# Altium PCB spb_pcb.PcbDoc
Units mm, origin at the board's own origin, x right, y up, seen from the top; angles counter-clockwise.
Board outline 91.69 x 83.57 mm, 2 copper layers (Top Layer, Bottom Layer); 104 components, 72 nets, 482 pads, 20 vias.
Unrouted connection lines stored in the file: 2.
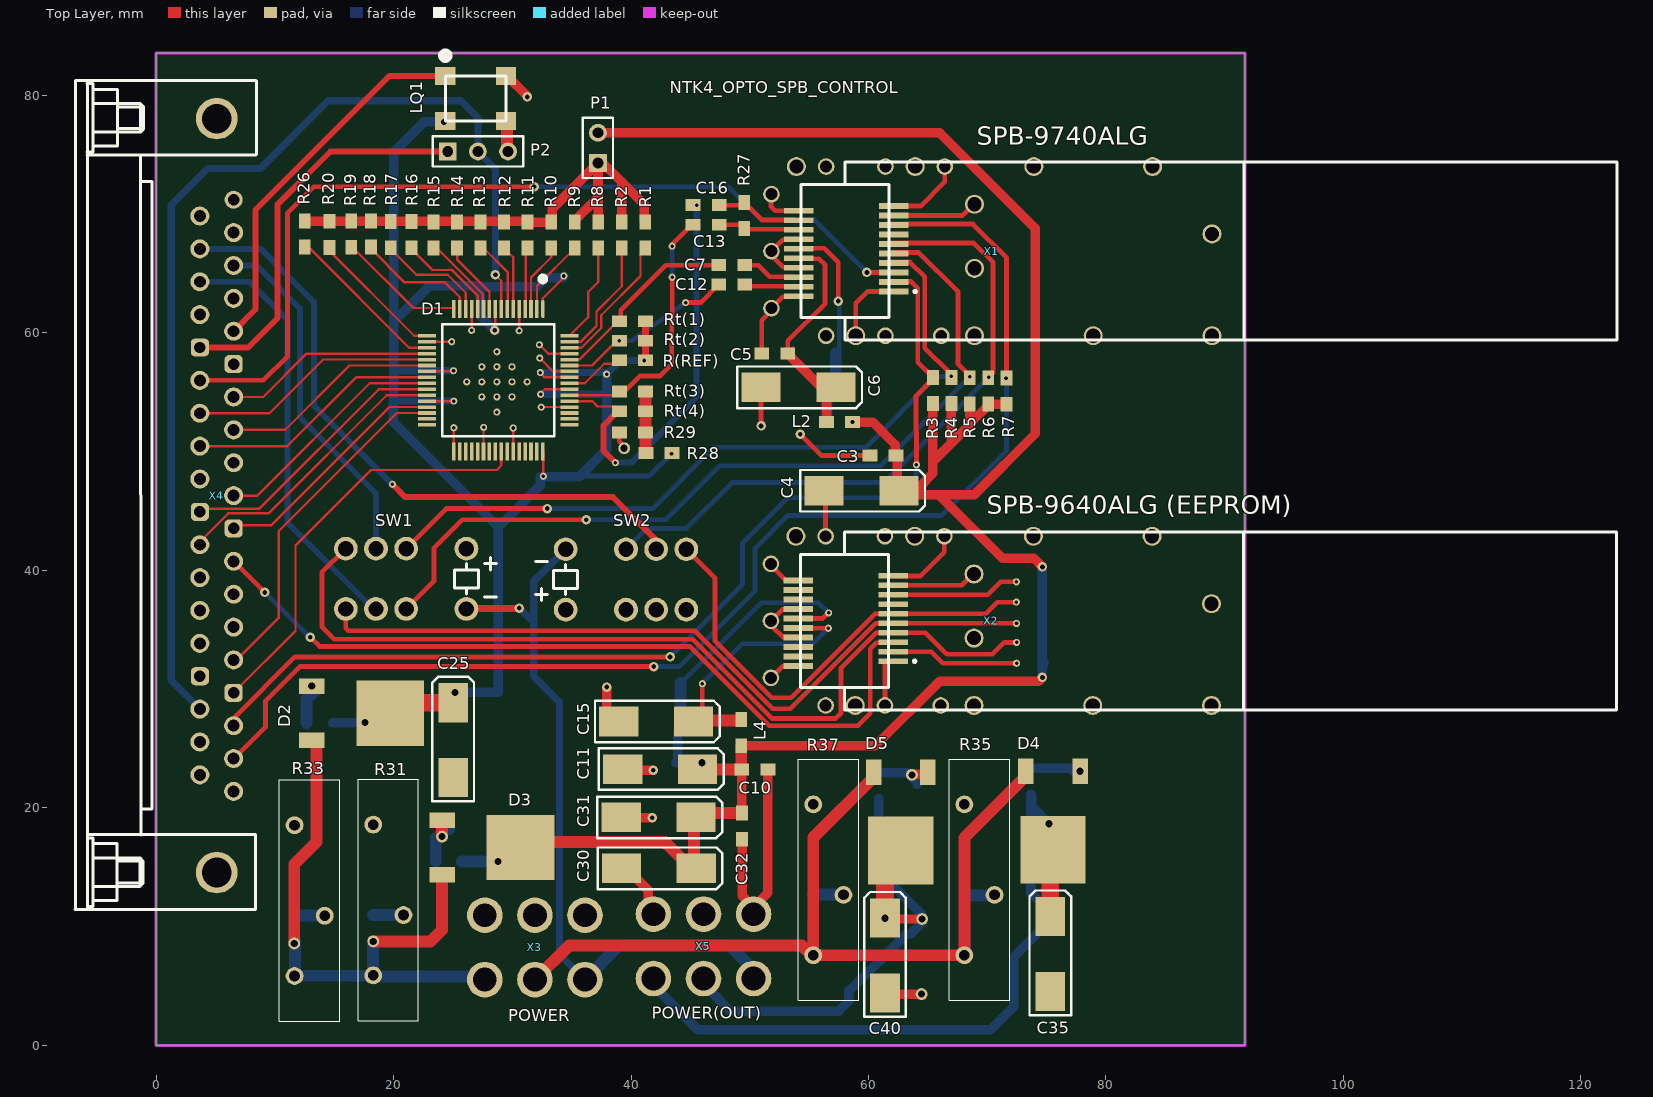
[diagram p0: Top Layer view]
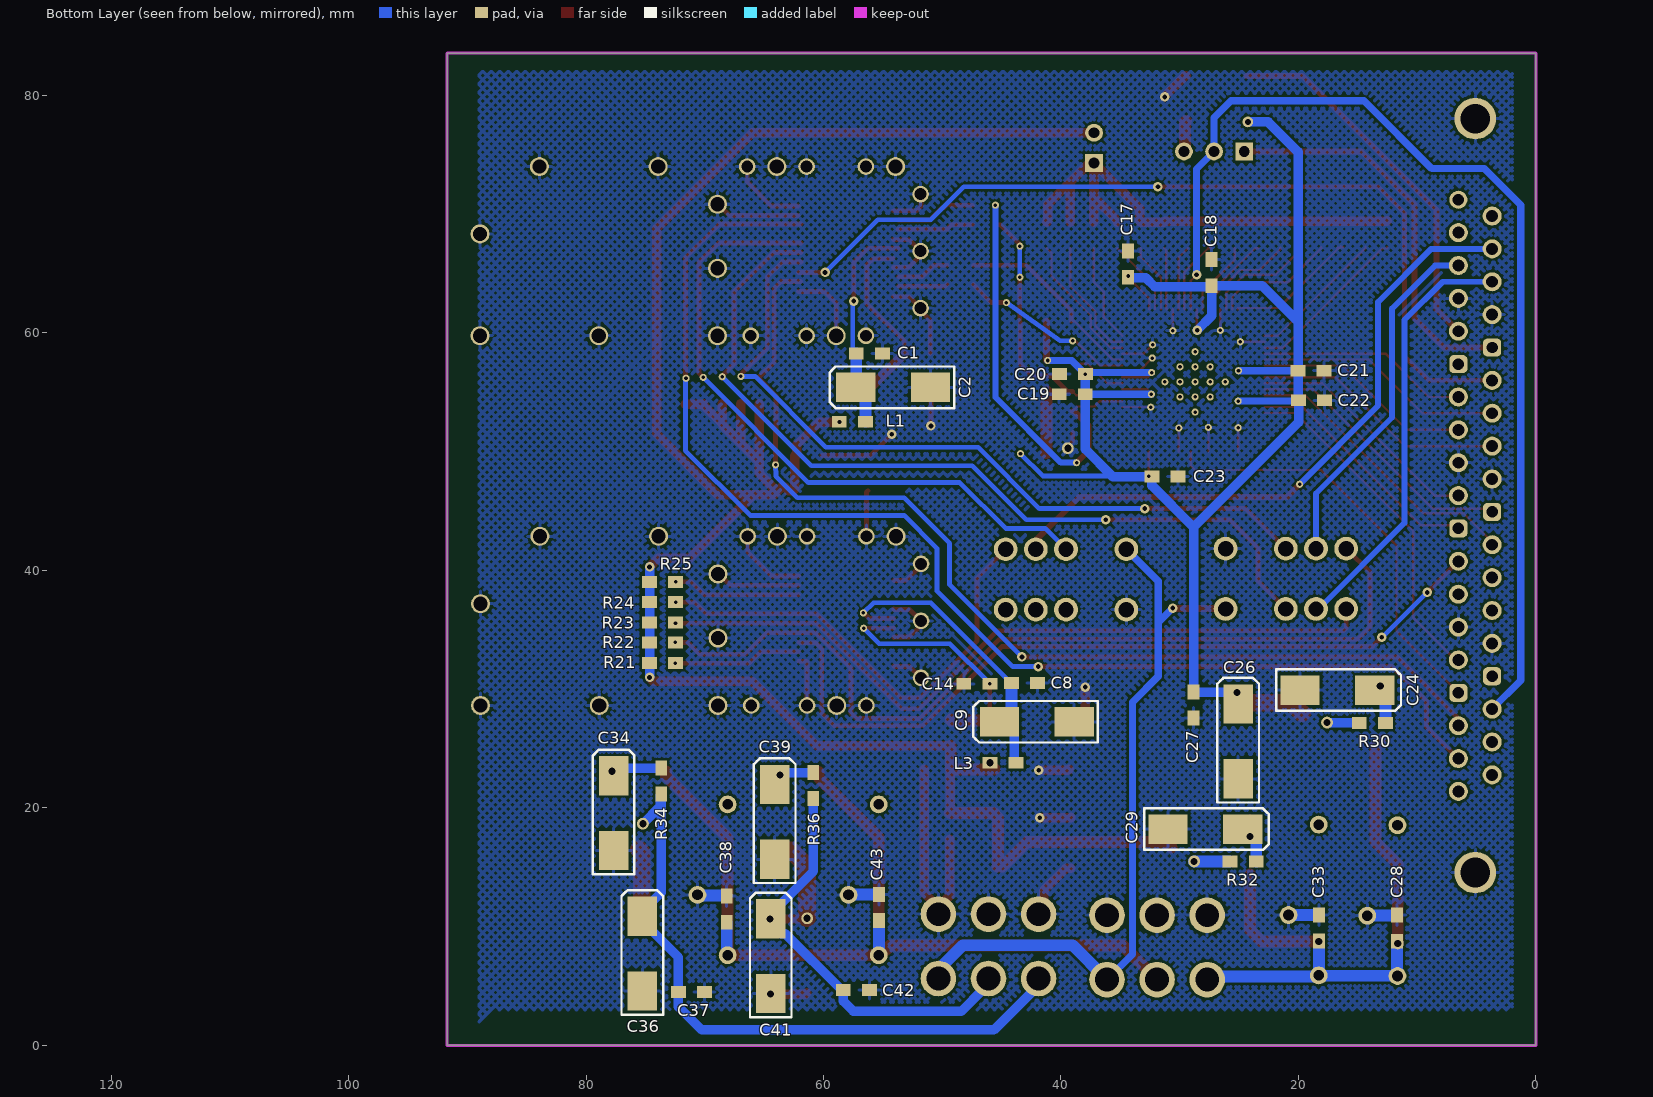
[diagram p1: Bottom Layer view, seen from below]

## Layer stack, top to bottom
Top Solder: solder mask 0.0102, Solder Resist, Dk 3.5
Top Layer: signal copper 0.0356
Dielectric 1: dielectric 0.32, FR-4, Dk 4.8
Bottom Layer: signal copper 0.0356
Bottom Solder: solder mask 0.0102, Solder Resist, Dk 3.5

## Board outline
0,0 91.694,0 91.694,83.566 0,83.566

## Design rules (kind name [scope] priority, off if disabled: settings)
Clearance [All] p1: gap=0.2 ignorepadtopadclearanceinfootprint=FALSE
HoleSize [All] p1: absolutevalues=TRUE maxlimit=2.54 minlimit=0.4 maxpercent=80.000 minpercent=20.000
MinimumAnnularRing [All] p1: minimumring=0.2
PolygonConnect [All] p1: connectstyle=Relief reliefconductorwidth=0.254 reliefentries=4 polygonreliefangle="90 Angle" airgapwidth=0.254
RoutingVias [All] p1: holewidth=0.711 width=1.27 viastyle="Through Hole" minholewidth=0.711 minwidth=1.27 maxholewidth=0.711 maxwidth=1.27
SolderMaskExpansion [All] p1: expansion=0.2
Width [All] p1: maxlimit=5 minlimit=0.2 preferedwidth=0.3
29 further rules are at their usual default settings.

## Components (designator, comment, footprint, x,y, rotation, side; value= is the part's Value field where it differs from the comment)
C1 "0,1" 0805 57.242,58.268 r180 bottom
C2 "10,0" TYPE_C 50.977,55.423 r0 bottom
C3 "0,1" 0805 62.322,49.682 r180 top
C4 "10,0" TYPE_C 56.26,46.711 r0 top
C5 "0,1" 0805 53.203,58.268 r180 top
C6 "10,0" TYPE_C 50.952,55.423 r0 top
C7 "0,1" 0805 49.581,65.71 r180 top
C8 "0,1" 0805 44.171,30.505 r180 bottom
C9 "10,0" TYPE_C 38.887,27.254 r0 bottom
C10 "0,1" 0805 49.327,23.241 r0 top
C11 "10,0" TYPE_C 39.293,23.266 r0 top
C12 "0,1" 0805 49.581,64.084 r180 top
C13 "0,1" 0805 47.422,69.113 r180 top
C14 "0,1" 0805 45.984,30.455 r0 bottom
C15 "10,0" TYPE_C 38.964,27.28 r0 top
C16 "0,1" 0805 47.422,70.764 r180 top
C17 "0,1" 0805 34.366,64.694 r90 bottom
C18 "0,1" 0805 27.305,63.983 r90 bottom
C19 "0,1" 0805 40.148,54.839 r180 bottom
C20 "0,1" 0805 40.122,56.54 r180 bottom
C21 "0,1" 0805 20.031,56.82 r180 bottom
C22 "0,1" 0805 19.99,54.331 r180 bottom
C23 "0,1" 0805 32.334,47.904 r180 bottom
C24 "10,0" TYPE_C 19.864,29.921 r180 bottom
C25 "22,0" TYPE_C 25.019,22.554 r90 top
C26 "10,0" TYPE_C 25.07,22.454 r90 bottom
C27 "0,1" 0805 28.829,27.569 r90 bottom
C28 "0,1" 0805 11.709,8.773 r90 bottom
C29 "10,0" TYPE_C 30.989,18.212 r180 bottom
C30 "22,0" TYPE_C 39.192,14.91 r0 top
C31 "10,0" TYPE_C 39.167,19.202 r0 top
C32 "0,1" 0805 49.352,17.358 r90 top
C33 "0,1" 0805 18.263,8.788 r90 bottom
C34 "10,0" TYPE_C 77.673,16.408 r90 bottom
C35 "22,0" TYPE_C 75.311,4.546 r90 top
C36 "10,0" TYPE_C 75.26,4.571 r90 bottom
C37 "0,1" 0805 70.012,4.496 r0 bottom
C38 "10,0" 0805 68.148,10.373 r90 bottom
C39 "10,0" TYPE_C 64.11,15.672 r90 bottom
C40 "22,0" TYPE_C 61.392,4.42 r90 top
C41 "10,0" TYPE_C 64.44,4.368 r90 bottom
C42 "0,1" 0805 56.134,4.648 r0 bottom
C43 "10,0" 0805 55.321,10.516 r90 bottom
D1 "TLK2501IRCP" Quad64 32.573,62.011 r180 top
D2 "LM1117" TO-252 13.106,30.251 r270 top
D3 "LM1117" TO-252 24.079,18.948 r270 top
D4 "LM1117" TO-252 77.826,23.089 r180 top
D5 "LM1117" TO-252 64.999,23.012 r180 top
L1 "1,0" 0805 56.474,52.527 r0 bottom
L2 "1,0" 0805 56.449,52.502 r0 top
L3 "1,0" 0805 43.774,23.8 r0 bottom
L4 "1,0" 0805 49.276,27.432 r270 top
LQ1 "125 MHz" "SOC7 SMD Clock Oscillator" 24.359,77.851 r0 top
P1 "Header 2" HDR1X2 37.211,74.32 r90 top
P2 "Header 3" HDR1X3 24.562,75.286 r0 top
R1 "4.7k" 0805 41.199,69.342 r270 top
R2 "4.7k" 0805 39.218,69.342 r270 top
R3 "4.7k" 0805 65.43,54.051 r90 top
R4 "4.7k" 0805 66.98,54.051 r90 top
R5 "4.7k" 0805 68.529,54.026 r90 top
R6 "4.7k" 0805 70.079,54.026 r90 top
R7 "4.7k" 0805 71.628,54 r90 top
R8 "4.7k" 0805 37.236,69.342 r270 top
R9 "4.7k" 0805 35.255,69.342 r270 top
R10 "4.7k" 0805 33.274,69.342 r270 top
R11 "4.7k" 0805 31.293,69.342 r270 top
R12 "4.7k" 0805 29.312,69.342 r270 top
R13 "4.7k" 0805 27.33,69.342 r270 top
R14 "4.7k" 0805 25.349,69.342 r270 top
R15 "4.7k" 0805 23.368,69.342 r270 top
R16 "4.7k" 0805 21.514,69.383 r270 top
R17 "4.7k" 0805 19.761,69.383 r270 top
R18 "4.7k" 0805 18.085,69.434 r270 top
R19 "4.7k" 0805 16.434,69.418 r270 top
R20 "4.7k" 0805 14.605,69.408 r270 top
R21 "4.7k" 0805 74.651,32.207 r180 bottom
R22 "4.7k" 0805 74.651,33.915 r180 bottom
R23 "4.7k" 0805 74.651,35.623 r180 bottom
R24 "4.7k" 0805 74.651,37.332 r180 bottom
R25 "4.7k" 0805 74.651,39.04 r180 bottom
R26 "4.7k" 0805 12.522,69.444 r270 top
R27 "100" 0805 49.53,68.793 r90 top
R28 "200" 0805 41.25,49.886 r0 top
R29 "810" 0805 39.014,51.613 r0 top
R30 "120" 0805 14.875,27.153 r180 bottom
R31 "RES_VAR" 3006P 18.288,18.593 r270 top
R32 "120" 0805 25.756,15.494 r180 bottom
R33 "RES_VAR" 3006P 11.659,18.542 r270 top
R34 "120" 0805 73.66,21.158 r90 bottom
R35 "RES_VAR" 3006P 68.072,20.295 r270 top
R36 "120" 0805 60.858,20.777 r90 bottom
R37 "RES_VAR" 3006P 55.347,20.295 r270 top
R(REF) "200" 0805 41.214,57.707 r180 top
Rt(1) "50" 0805 41.214,60.983 r180 top
Rt(2) "50" 0805 41.214,59.343 r180 top
Rt(3) "50" 0805 41.214,55.067 r180 top
Rt(4) "50" 0805 41.214,53.406 r180 top
SW1 "Signal Relay 5VDC" "V23079 Relay" 26.137,41.834 r180 top
SW2 "Signal Relay 5VDC" "V23079 Relay" 34.493,36.703 r0 top
X1 "SPB-9740ALG" SFP-20pin 62.125,63.491 r90 top
X2 "SPB-9640ALG (EEPROM)" SFP-20pin 62.085,32.35 r90 top
X3 "POWER" POWER 31.902,13.157 r180 top
X4 "CHEAP_CON_37_FEMALE" CHEAP_CONN_FEMALE 5.105,14.554 r90 top
X5 "POWER(OUT)" POWER 46.101,13.247 r180 top

## Footprints (in the part's own frame and the unit in brackets; to place one, negate y for a bottom-side part, rotate by r counter-clockwise, add the part's x,y. Pads: shape width x height; smd on the part's side, far side on the other; paste and mask are expansions set on the pad)
0805 [mm]
  rect 1.25x1 smd: 1(0,0) 2(2.2,0)
  body extent -0.73,-0.6 2.93,0.6, height 1.25
3006P [mm]
  round 1.5 hole 0.9: 1(0,0) 2(7.62,2.54) 3(12.7,0)
  silkscreen extent -3.81,-1.27 16.51,3.81, body extent -3.86,-1.32 18.03,3.86, height 6.35
CHEAP_CONN_FEMALE [mm] "CHEAP_CONN_FEMALE"
  round 1.6 hole 1: 1(6.833,-1.422) 2(9.601,-1.422) 3(12.37,-1.422) 5(17.907,-1.422) 6(20.676,-1.422) 7(23.444,-1.422) 8(26.213,-1.422) 10(31.75,-1.422) 11(34.519,-1.422) 12(37.287,-1.422) 13(40.056,-1.422) 15(45.593,-1.422) 16(48.362,-1.422) 17(51.13,-1.422) 18(53.899,-1.422) 20(8.23,1.422) 21(10.998,1.422) 22(13.767,1.422) 24(19.304,1.422) 25(22.073,1.422) 26(24.841,1.422) 27(27.61,1.422) 29(33.147,1.422) 30(35.916,1.422) 31(38.684,1.422) 32(41.453,1.422) 34(46.99,1.422) 35(49.759,1.422) 36(52.527,1.422) 37(55.296,1.422)
  rrect50% 1.524x1.524 hole 0.965: 4(15.138,-1.422) 9(28.981,-1.422) 14(42.824,-1.422) 23(16.535,1.422) 28(30.378,1.422) 33(44.221,1.422)
  round 1.524 hole 0.965: 19(56.667,-1.422)
  round 3.5 hole 2.5: 38(0,0) 39(63.5,0)
  silkscreen extent -3.11,-3.36 66.72,11.92
HDR1X2 [mm] "Connector; Header; 2 Position"
  rect 1.5x1.5 hole 0.9: 1(0,0)
  round 1.5 hole 0.9: 2(2.54,0)
  silkscreen extent -1.27,-1.27 3.81,1.27
HDR1X3 [mm] "Connector; Header; 3 Position"
  rect 1.5x1.5 hole 0.9: 1(0,0)
  round 1.5 hole 0.9: 2(2.54,0) 3(5.08,0)
  silkscreen extent -1.27,-1.27 6.35,1.27
POWER [mm] "POWER"
  round 3 hole 2: 1(4.217,7.62) 2(0,7.62) 3(-4.217,7.62) 4(4.217,2.198) 5(0,2.198) 6(-4.217,2.198)
Quad64 [mm]
  oval 0.3x1.5 smd: 1(0,0)
  rect 0.3x1.5 smd: 2(0.5,0) 3(1,0) 4(1.5,0) 5(2,0) 6(2.5,0) 7(3,0) 8(3.5,0) 9(4,0) 10(4.5,0) 11(5,0) 12(5.5,0) 13(6,0) 14(6.5,0) 15(7,0) 16(7.5,0) 33(7.5,12) 34(7,12) 35(6.5,12) 36(6,12) 37(5.5,12) 38(5,12) 39(4.5,12) 40(4,12) 41(3.5,12) 42(3,12) 43(2.5,12) 44(2,12) 45(1.5,12) 46(1,12) 47(0.5,12) 48(0,12)
  rect 1.5x0.3 smd: 17(9.75,2.25) 18(9.75,2.75) 19(9.75,3.25) 20(9.75,3.75) 21(9.75,4.25) 22(9.75,4.75) 23(9.75,5.25) 24(9.75,5.75) 25(9.75,6.25) 26(9.75,6.75) 27(9.75,7.25) 28(9.75,7.75) 29(9.75,8.25) 30(9.75,8.75) 31(9.75,9.25) 32(9.75,9.75) 49(-2.25,9.75) 50(-2.25,9.25) 51(-2.25,8.75) 52(-2.25,8.25) 53(-2.25,7.75) 54(-2.25,7.25) 55(-2.25,6.75) 56(-2.25,6.25) 57(-2.25,5.75) 58(-2.25,5.25) 59(-2.25,4.75) 60(-2.25,4.25) 61(-2.25,3.75) 62(-2.25,3.25) 63(-2.25,2.75) 64(-2.25,2.25)
  silkscreen extent -0.97,-2.74 8.46,10.71, body extent -0.96,1.29 8.46,10.71, height 1
SFP-20pin [mm] "SFP-20pin"
  rect 0.5x2.5 smd: 1(0,0) 2(0.8,0) 3(1.6,0) 4(2.4,0) 5(3.2,0) 6(4,0) 7(4.8,0) 8(5.6,0) 9(6.4,0) 10(7.2,0) 11(6.8,8) 12(6,8) 13(5.2,8) 14(4.4,8) 15(3.6,8) 16(2.8,8) 17(2,8) 18(1.2,8) 19(0.4,8) 20(-0.4,8)
  round 1.4 hole 1: h(-3.725,-4) h(-3.725,0.7) h(-3.725,5.7) h(-1.4,10.3) h(3.4,10.3) h(8.2,10.3) h(10.525,-4.3) h(10.525,0.7) h(10.525,5.7)
  round 1.6 hole 1.2: h(-3.725,3.2) h(-3.725,-16.8) h(-3.725,-6.8) h(-3.725,-26.8) h(1.95,-6.8) h(4.85,-26.8) h(7.35,-6.8) h(10.525,-1.8) h(10.525,8.2) h(10.525,-21.8) h(10.525,-11.8)
  silkscreen extent -4.1,-60.9 10.9,7.8, body extent -4.1,-60.9 10.9,7.8, height 9
"SOC7 SMD Clock Oscillator" [mm]
  rect 1.7x1.5 smd: 1(0,3.8) 2(5.1,3.8) 3(5.1,0) 4(0,0)
  silkscreen extent -0.1,0 5.1,5.6, body extent 0,0 5.1,3.8, height 1.8
TO-252 [mm]
  rect 1.3x2.15 smd: 1(0,0) 3(4.572,0)
  rect 5.5x5.7 smd: 2(2.286,6.604)
  body extent -0.75,-1.18 5.32,9.56, height 2.55
TYPE_C [mm]
  rect 3.3x2.5 smd: 1(0,0) 2(6.3,0)
  silkscreen extent -2,-1.75 8.5,1.75, body extent -1.75,-1.35 8.05,1.35, height 2.5
"V23079 Relay" [mm]
  round 2 hole 1.3: 1(7.62,5.08) 2(5.08,5.08) 3(10.16,5.08) 4(7.62,0) 5(5.08,0) 6(10.16,0) 7(0,0) 8(0,5.08)
  silkscreen extent -2.54,0.76 1.02,4.06, body extent -1.1,-1.1 11.26,6.18, height 10

## Part data
C1 C3 C5 C7 C8 C10 C12 C13 C14 C16 C17 C18 C19 C20 C21 C22 C23 C27 C28 C32 C33 C37 C38 C42 C43: library part CAP_SMALL, "0805"
C2 C4 C6 C9 C11 C15 C24 C25 C26 C29 C30 C31 C34 C35 C36 C39 C40 C41: library part CAP_TANT, "SMD"
D2 D3 D4 D5: library part LM1117_ADJ
L1 L2 L3 L4: library part INDUCT, "0805"
LQ1: library part "SOC7 SMD Clock Oscillator"
P1: "Header, 2-Pin", LatestRevisionDate=17-Jul-2002, LatestRevisionNote="Re-released for DXP Platform.", Publisher="Altium Limited"
P2: "Header, 3-Pin", LatestRevisionDate=17-Jul-2002, LatestRevisionNote="Re-released for DXP Platform.", Publisher="Altium Limited"
R1 R2 R3 R4 R5 R6 R7 R8 R9 R10 R11 R12 R13 R14 R15 R16 R17 R18 R19 R20 R21 R22 R23 R24 R25 R26 R27 R28 R29 R30 R34 R36 R(REF) Rt(1) Rt(2) Rt(3) Rt(4): library part RES0805, "0805"
R31 R33 R35 R37: "PV36W102C (СП5-2ВБ) 1 кОм"
R32: library part RES0805
SW1 SW2: library part SWITCH
X1 X2: library part SFP-20pin
X5: library part POWER

## Free pads (board coordinates)
  round 1 hole 0.6: 3(11.633,8.585) 3(13.106,30.251) 3(17.59,27.191) 3(18.288,8.763) 3(24.079,17.577) 3(25.171,29.718) 3(28.778,15.494) 3(39.421,50.292) 3(45.974,23.8) 3(61.373,10.701) 3(63.652,22.784) 3(64.465,4.318) 3(64.516,10.643) 3(75.209,18.669) 3(77.826,23.089)
  round 0.6 hole 0.3: 3(19.901,47.257) 3(24.892,59.258) 3(25.044,56.82) 3(25.073,52.016) 3(25.076,54.261) 3(26.162,55.88) 3(26.573,60.218) 3(27.432,54.61) 3(27.432,55.88) 3(27.432,57.15) 3(27.584,52.045) 3(28.702,53.34) 3(28.702,54.61) 3(28.702,55.88) 3(28.702,57.15) 3(28.702,58.42) 3(29.972,54.61) 3(29.972,55.88) 3(29.972,57.15) 3(30.073,51.994) 3(30.573,60.19) 3(31.242,55.88) 3(32.283,59.004) 3(32.309,57.887) 3(32.36,56.667) 3(32.385,54.839) 3(32.436,53.746) 3(32.614,47.93) 3(34.341,64.795) 3(37.935,56.528) 3(38.684,49.073) 3(39.014,59.334) 3(41.123,57.683) 3(43.409,49.835) 3(43.459,64.694) 3(43.459,67.31) 3(44.595,62.56) 3(45.517,70.764) 3(46.006,30.461) 3(56.617,35.128) 3(56.642,36.424) 3(58.649,52.502) 3(64.033,48.895) 3(66.954,56.337) 3(68.529,56.312) 3(70.129,56.261) 3(71.577,56.185) 3(72.451,37.332) 3(72.451,39.04) 3(72.464,35.535) 3(72.466,32.182) 3(72.466,33.934)
  round 0.9 hole 0.5: 3(24.257,77.775)

## Via types
v1: diameter 0.8, hole 0.4, Top Layer to Bottom Layer, 20 vias

## Nets (pads, with @x,y where several pads share a name; then routed paths per layer and width w, separated by ;. In a path a pad name is that pad's centre, name@x,y a point inside that pad or via, vN(x,y) a via of type N, cw(c..) or ccw(c..) an arc to the next point about the centre after c; other vN are vias at no path point)
125MHZ_OE: LQ1.1 X4.15 | length 31.6
  Top Layer w0.5: X4.15 8.357,61.976 8.357,70.358 19.65,81.651 LQ1.1
/SWITCH: SW1.8 SW2.8 X3.3 X5.3 | length 62.7
  Top Layer w0.6: SW1.8 26.175,36.792 30.543,36.792 v1(30.582,36.83)
  Bottom Layer w0.6: v1(30.582,36.83) 31.801,35.611 ; SW2.8 31.801,39.091 31.801,35.611 ; X3.3 33.985,7.672 33.985,28.905 31.801,31.09 31.801,35.611
  Bottom Layer w1: SW1.8 SW1.8@26.518,36.754 ; X3.3 39.015,8.433 48.26,8.433 49.936,6.757 49.936,6.009 X5.3
CH0: C28.1 C33.1 D2.3 D3.3 pad.3@11.633,8.585 pad.3@18.288,8.763 R31.3 R33.3 X3.1 | length 50.9
  Top Layer w1: pad.3@11.633,8.585 11.633,15.265 13.513,17.145 13.513,25.273 D2.3 ; pad.3@18.288,8.763 23.114,8.763 24.079,9.728 D3.3
  Bottom Layer w1: R33.3 R33.3@11.684,5.867 ; C28.1 11.709,5.893 R33.3@11.684,5.867 ; C33.1 18.263,5.918 R31.3 ; X3.1 27.425,5.797 18.384,5.797 R31.3 ; R33.3@11.684,5.867 18.263,5.867 R31.3
CH1: C38.1 C43.1 D4.3 D5.3 R35.3 R37.3 X3.2 | length 78.7
  Top Layer w1: X3.2 34.773,8.407 54.399,8.407 R37.3@55.211,7.595 ; D5.3 60.427,22.587 55.347,17.507 55.347,7.73 R37.3@55.211,7.595 ; D4.3 73.254,22.664 68.072,17.482 R35.3 R37.3 R37.3@55.211,7.595
  Bottom Layer w1: C43.1 55.321,7.62 R37.3 ; R35.3 68.148,7.671 C38.1
DETECT: pad.3@70.129,56.261 R6.2 SW2.2 X1.6 | length 55.7
  Top Layer w0.4: X1.6@61.874,67.576 68.873,67.576 70.485,65.964 70.485,56.632 R6.2
  Bottom Layer w0.4: SW2.2 41.326,43.536 44.653,43.536 48.514,47.396 61.265,47.396 pad.3@70.129,56.261
ENABLE: D1.24 X4.30 | length 21.5
  Top Layer w0.2: X4.30 11.049,50.47 16.841,56.261 D1.24
FAULT: pad.3@64.033,48.895 R3.2 X1.2 X4.3 | length 88
  Top Layer w0.4: X4.3 6.528,27.559 11.684,32.715 v1(43.282,32.715) ; X1.2@61.924,64.326 63.588,64.326 64.145,63.77 64.145,57.537 R3.2 65.43,56.126 64.008,54.704 pad.3@64.033,48.895
  Bottom Layer w0.4: v1(43.282,32.715) 49.378,38.811 49.378,42.291 53.213,46.126 62.205,46.126 64.008,47.93 pad.3@64.033,48.895
FPGA_DETECT: pad.3@19.901,47.257 SW2.1 X4.36 | length 54.5
  Top Layer w0.5: pad.3@19.926,47.282 19.926,47.231 20.98,46.177 38.481,46.177 42.113,42.545 SW2.1
  Bottom Layer w0.5: X4.36 8.814,67.081 13.284,62.611 13.284,53.887 pad.3@19.901,47.257
FPGA_SCL: SW1.1 X4.35 | length 36.3
  Bottom Layer w0.5: X4.35 7.849,64.313 11.074,61.087 11.074,43.993 18.313,36.754 SW1.1
FPGA_SDA: SW1.4 X4.17 | length 30
  Bottom Layer w0.5: X4.17 8.484,65.684 12.116,62.052 12.116,52.883 18.517,46.482 SW1.4
GND: C1.2 C2.1 C3.2 C4.1 C5.2 C6.1 C8.2 C9.1 C10.2 C11.1 C14.2 C15.1 C17.2 C18.2 C19.1 C20.1 C21.2 C22.2 C23.2 C24.1 C25.1 C26.1 C27.1 C28.2 C29.1 C30.1 C31.1 C32.1 C33.2 C34.1 C35.1 C36.1 C37.1 C38.2 C39.1 C40.1 C41.1 C42.1 C43.2 D1.5 D1.13 D1.18 D1.33 D1.38 D1.43 D1.52 D1.58 D1.61 LQ1.2 pad.3@24.892,59.258 pad.3@25.073,52.016 pad.3@26.573,60.218 pad.3@27.584,52.045 pad.3@30.073,51.994 pad.3@30.573,60.19 pad.3@32.283,59.004 pad.3@32.309,57.887 pad.3@32.436,53.746 pad.3@39.421,50.292 pad.3@64.465,4.318 R29.1 R31.2 R33.2 R35.2 R37.2 SW1.7 SW2.7 X1.1 X1.9 X1.10 X1.11 X1.14 X1.17 X1.20 X1.h X2.1 X2.9 X2.10 X2.11 X2.14 X2.17 X2.20 X2.h X3.4 X3.5 X3.6 X4.6 X4.11 X4.16 X4.24 X4.29 X4.34 X4.38 X4.39 X5.4 X5.5 X5.6 | length 149.6
  Top Layer w0.2: D1.18 24.889,59.261 pad.3@24.892,59.258 ; pad.3@25.07,52.019 25.073,52.016 D1.33 ; D1.13 26.573,60.218 pad.3@26.594,60.198 ; D1.38 27.573,51.932 27.584,51.943 pad.3@27.584,52.045 ; pad.3@30.048,52.019 30.073,51.994 D1.43 ; pad.3@30.556,60.173 30.573,60.19 D1.5 ; pad.3@32.283,59.004 33.027,58.261 D1.61 ; pad.3@32.309,57.887 33.434,56.761 D1.58 ; pad.3@32.436,53.746 32.45,53.761 D1.52
  Top Layer w0.4: R29.1 39.014,50.861 39.421,50.454 pad.3@39.421,50.292 ; v1(50.952,52.172) C6.1 ; C5.2 51.003,61.075 51.825,61.897 51.825,62.091 52.775,63.041 54.075,63.041 X1.20 ; X2.h@51.785,30.95 52.735,31.9 54.035,31.9 X2.20 ; X2.h@51.785,40.55 51.785,40.45 53.085,39.15 X2.11 ; X1.h@51.825,71.691 51.791,71.656 51.791,70.637 52.137,70.291 X1.11 ; X2.17 54.035,34.4 52.769,34.4 51.976,35.193 51.976,35.559 51.785,35.75 52.735,36.7 54.035,36.7 X2.14 ; X1.17 54.075,65.541 52.81,65.541 52.017,66.334 52.017,66.7 51.825,66.891 52.775,67.841 54.075,67.841 X1.14 ; v1(54.254,51.46) 56.032,49.682 C3.2 ; C4.1 56.385,46.586 X2.h@56.385,42.875 ; X1.h@58.925,59.766 58.925,62.515 59.902,63.491 X1.1 ; X2.h@61.385,28.625 61.385,32.3 61.435,32.35 X2.1 ; X2.9 67.855,38.75 68.805,39.7 X2.h@68.885,39.7 ; X2.10 62.113,39.522 64.364,39.522 66.385,41.544 X2.h@66.385,42.875 ; X1.9 67.896,69.891 68.846,70.841 X1.h@68.925,70.841 ; X1.10 64.392,70.691 66.417,72.716 66.417,74.008 X1.h@66.425,74.016
  Top Layer w0.8: LQ1.2 29.559,81.651 31.267,79.942 v1(31.267,79.883) ; v1(37.948,30.175) 37.948,28.13 38.798,27.28 C15.1 ; C31.1 39.192,19.177 v1(41.783,19.177) ; C30.1 39.592,14.91 41.463,13.039 41.463,11.47 X5.4 ; C11.1 39.395,23.165 v1(41.859,23.165) ; C32.1 49.352,12.611 X5.6@50.318,11.644 ; X5.6 X5.6@50.318,11.644 ; C10.2 51.527,12.853 X5.6@50.318,11.644 ; C40.1 61.493,4.318 pad.3@64.465,4.318
  Bottom Layer w1: C28.2 11.709,10.947 14.173,10.947 R33.2 ; C33.2 18.263,10.981 20.82,10.981 R31.2 ; C43.2 55.321,12.695 57.866,12.695 R37.2 ; C38.2 68.148,12.624 70.561,12.624 R35.2
GTX_CLK_FROM_FPGA: P2.1 X4.33 | length 33.3
  Top Layer w0.5: X4.33 7.747,58.776 10.236,61.265 10.236,70.841 14.681,75.286 P2.1
GTX_CLK_TO_FPGA: D1.8 P2.2 X4.22 | length 90.5
  Top Layer w0.2: v1(28.575,64.897) 29.073,64.399 D1.8
  Bottom Layer w0.6: X4.22 1.27,30.734 1.27,70.79 4.318,73.838 8.763,73.838 14.478,79.553 25.679,79.553 27.102,78.13 P2.2 28.575,73.812 v1(28.575,64.897)
LCKREFN: D1.25 X4.10 | length 20.2
  Top Layer w0.2: X4.10 8.534,46.304 17.991,55.761 D1.25
LOOPEN: D1.21 X4.31 | length 21
  Top Layer w0.2: X4.31 9.55,53.238 14.073,57.761 D1.21
LOS: pad.3@71.577,56.185 R7.2 X1.8 X4.2 | length 106.3
  Top Layer w0.4: X4.2 9.22,26.848 9.22,29.032 12.09,31.902 v1(41.91,31.902) ; X1.8@61.874,69.176 62.76,69.176 68.797,69.176 71.628,66.345 R7.2
  Bottom Layer w0.4: v1(41.91,31.902) 44.069,31.902 50.444,38.278 50.444,40.691 ; 50.444,40.811 50.444,41.859 53.213,44.628 66.167,44.628 71.628,50.089 71.628,56.134 pad.3@71.603,56.159
NetC1_1: C1.1 C2.2 L1.1 X1.15 | length 18.2
  Top Layer w0.4: X1.15@53.674,67.132 56.261,67.132 57.455,65.938 v1(57.455,62.687)
  Bottom Layer w0.4: C1.1 57.525,58.551 57.525,62.617 v1(57.455,62.687)
  Bottom Layer w1: L1.1 56.474,54.673 57.224,55.423 C2.2 57.242,55.458 C1.1
NetC5_1: C5.1 C6.2 L2.1 X1.16 | length 19.1
  Top Layer w0.4: C5.1@53.203,58.227 C5.1 ; C5.1@53.602,58.666 C5.1 ; X1.16 54.161,66.256 55.816,66.256 56.337,65.735 56.337,62.459 53.203,59.325 C5.1
  Top Layer w0.8: C5.1@53.203,58.227 56.49,54.94 56.49,52.705 L2.1@56.21,52.426
NetC7_2: C7.2 D1.60 Rt(1).2 | length 16.3
  Top Layer w0.2: D1.60 35.648,57.761 35.873,57.987 37.8,59.914 38.87,60.983 39.014,60.983
  Top Layer w0.4: 39.139,60.983 39.139,61.923 42.926,65.71 C7.2
NetC8_1: C8.1 C9.2 L3.1 pad.3@56.642,36.424 X2.15 | length 26.3
  Top Layer w0.4: X2.15 56.114,35.95 56.588,36.424 pad.3@56.642,36.424
  Bottom Layer w0.4: C8.1 50.952,37.287 55.778,37.287 pad.3@56.642,36.424
  Bottom Layer w0.8: L3.1 43.837,23.8 43.937,23.9 43.937,26.404 44.787,27.254 44.921,27.254 C9.2
  Bottom Layer w1: C8.1 44.171,28.004 C9.2@44.921,27.254
NetC12_2: C12.2 D1.59 pad.3@39.014,59.334 pad.3@44.595,62.56 Rt(2).2 | length 15.1
  Top Layer w0.2: D1.59 36.712,57.261 38.786,59.334 pad.3@39.014,59.334
  Top Layer w0.4: pad.3@44.595,62.56 45.857,62.56 C12.2
  Bottom Layer w0.4: pad.3@39.014,59.334 40.056,59.334 pad.3@44.595,62.56
NetC13_2: C13.2 D1.54 pad.3@43.459,64.694 pad.3@43.459,67.31 Rt(3).2 | length 22.2
  Top Layer w0.2: D1.54 38.708,54.761 39.014,55.067
  Top Layer w0.4: 39.014,55.067 39.421,55.067 40.727,56.373 42.428,56.373 43.434,57.379 pad.3@43.459,64.694 ; pad.3@43.459,67.31 43.498,67.348 43.498,67.514 45.097,69.113 C13.2
  Bottom Layer w0.4: pad.3@43.459,64.694 pad.3@43.459,67.31
NetC14_1: C14.1 C15.2 L4.1 pad.3@46.006,30.461 pad.3@56.617,35.128 X2.16 | length 22.6
  Top Layer w0.4: C15.2@45.34,27.356 46.006,28.022 pad.3@46.006,30.461 ; X2.16 54.096,35.139 56.606,35.139 pad.3@56.617,35.128
  Top Layer w1: C15.2 45.34,27.356 49.276,27.356 L4.1
  Bottom Layer w0.4: pad.3@46.006,30.461 46.006,30.487 49.352,33.833 55.321,33.833 pad.3@56.617,35.128
NetC16_2: C16.2 D1.53 pad.3@38.684,49.073 pad.3@45.517,70.764 Rt(4).2 | length 35.2
  Top Layer w0.2: D1.53 36.729,54.261 37.184,53.806 38.614,53.806 39.014,53.406
  Top Layer w0.5: pad.3@38.684,49.073 37.694,50.063 37.694,52.21 38.889,53.406 39.014,53.406
  Bottom Layer w0.5: pad.3@38.684,49.073 40.005,49.073 45.517,54.585 pad.3@45.517,70.764
NetC24_2: C24.2 D2.1 pad.3@13.106,30.251 R30.2 | length 3.2
  Bottom Layer w1: R30.2 12.675,29.171 13.425,29.921 C24.2
NetC29_2: C29.2 D3.1 pad.3@24.079,17.577 R32.2 | length 4.8
  Top Layer w1: pad.3@24.079,17.577 D3.1
  Bottom Layer w1: R32.2 23.556,17.462 24.306,18.212 C29.2
NetC34_2: C34.2 D4.1 pad.3@77.826,23.089 R34.2 | length 4.3
  Bottom Layer w0.8: R34.2 77.023,23.358 C34.2
NetC39_2: C39.2 D5.1 pad.3@63.652,22.784 R36.2 | length 5.2
  Top Layer w0.8: pad.3@63.652,22.784 63.691,22.822 64.808,22.822 D5.1
  Bottom Layer w0.8: R36.2 63.26,22.977 64.11,22.127 C39.2
NetD1_2: D1.2 R9.2 | length 6.4
  Top Layer w0.2: D1.2 32.073,63.96 R9.2
NetD1_3: D1.3 R10.2 | length 5.8
  Top Layer w0.2: D1.3 31.573,64.67 33.274,66.37 R10.2
NetD1_4: D1.4 R11.2 | length 5.2
  Top Layer w0.2: D1.4 31.123,62.061 31.123,66.973 R11.2
NetD1_6: D1.6 R12.2 | length 5.4
  Top Layer w0.2: R12.2 30.073,66.38 D1.6
NetD1_7: D1.7 R13.2 | length 6.2
  Top Layer w0.2: R13.2 27.6,67.142 29.605,65.137 29.605,62.043 D1.7
NetD1_10: D1.10 R14.2 | length 6.3
  Top Layer w0.2: R14.2 25.349,66.176 28.073,63.452 D1.10
NetD1_11: D1.11 R15.2 | length 7
  Top Layer w0.2: R15.2 23.644,67.142 27.523,63.263 27.523,62.061 D1.11
NetD1_12: D1.12 R16.2 | length 8.4
  Top Layer w0.2: R16.2 21.514,67.058 23.268,65.303 24.917,65.303 27.073,63.147 D1.12
NetD1_14: D1.14 R17.2 | length 9.3
  Top Layer w0.2: R17.2 19.761,67.058 21.922,64.897 24.562,64.897 26.073,63.385 D1.14
NetD1_15: D1.15 R18.2 | length 10.3
  Top Layer w0.2: R18.2 18.085,67.109 20.932,64.262 24.333,64.262 25.573,63.022 D1.15
NetD1_16: D1.16 R19.2 | length 11.2
  Top Layer w0.2: R19.2@16.224,67.218 R19.2 ; R19.2@16.439,67.303 16.564,67.178 R19.2@16.7,67.178 ; R19.2@16.651,67.119 21.666,62.103 25.073,62.103 25.123,62.103 25.123,62.061 D1.16
NetD1_17: D1.17 R20.2 | length 11.7
  Top Layer w0.2: R20.2@14.351,67.269 14.351,67.144 21.734,59.761 D1.17
NetD1_19: D1.19 R26.2 | length 13.9
  Top Layer w0.2: R26.2 12.522,67.119 12.952,67.119 21.31,58.761 D1.19
NetD1_56: D1.56 R(REF).2 | length 4.4
  Top Layer w0.2: D1.56 36.101,55.761 37.744,57.404 38.532,57.404
NetD1_62: D1.62 R1.2 | length 11.6
  Top Layer w0.2: D1.62 35.825,58.761 37.49,60.427 37.49,61.493 40.799,64.802 40.799,66.742 R1.2
NetD1_63: D1.63 R2.2 | length 10.3
  Top Layer w0.2: D1.63@34.873,59.311 D1.63 34.835,59.249 35.747,59.249 37.09,60.592 37.09,61.805 39.218,63.932 R2.2
NetD1_64: D1.64 R8.2 | length 8.4
  Top Layer w0.2: D1.64 36.398,61.336 36.398,63.457 37.236,64.295 R8.2
NetLQ1_3: LQ1.3 P2.3 | length 2.6
  Top Layer w1: LQ1.3 29.55,77.759 29.55,75.377 P2.3
NetP1_1: P1.1 R1.1 R2.1 R8.1 R9.1 R10.1 R11.1 R12.1 R13.1 R14.1 R15.1 R16.1 R17.1 R18.1 R19.1 R20.1 R26.1 | length 48
  Top Layer w0.8: R26.1 12.573,69.393 23.368,69.393 31.242,69.393 R11.1 R10.1 33.374,69.442 33.374,70.483 P1.1 ; R9.1 35.255,69.467 37.211,71.423 P1.1 ; R8.1 37.224,69.355 37.224,74.308 P1.1 ; P1.1@37.643,74.295 39.218,72.72 ; R2.1 39.218,72.72 ; R1.1 41.099,69.442 41.099,70.839 39.218,72.72
NetR21_2: pad.3@72.466,32.182 R21.2 X2.2 | length 10.8
  Top Layer w0.4: X2.2 65.3,33.15 66.269,32.182 pad.3@72.466,32.182
NetR25_2: pad.3@72.451,39.04 R25.2 X2.8 | length 10.9
  Top Layer w0.4: X2.8@62.135,38 X2.8 70.03,37.95 71.12,39.04 pad.3@72.451,39.04
PRBSEN: D1.26 X4.28 | length 23.4
  Top Layer w0.2: X4.28 3.955,45.204 8.704,45.204 18.761,55.261 D1.26
RD+: C13.1 R27.1 X1.13 | length 6.5
  Top Layer w0.4: C13.1 49.23,69.113 49.53,68.813 R27.1 49.585,68.738 X1.13@53.747,68.738
RD-: C16.1 R27.2 X1.12 | length 7
  Top Layer w0.4: C16.1 49.301,70.764 R27.2 49.53,70.868 49.83,70.568 49.955,70.568 51.003,69.52 X1.12@53.674,69.52
RX_CLK: D1.41 X4.4 | length 35.9
  Top Layer w0.2: X4.4 11.735,34.9 11.735,42.113 18.085,48.463 28.702,48.463 29.073,48.835 D1.41
RX_DV/LOS: D1.30 X4.5 | length 29.2
  Top Layer w0.2: X4.5 6.782,32.461 10.312,35.992 10.312,43.307 20.266,53.261 D1.30
RX_ER/PRBS_PASS: D1.29 X4.9 | length 20.5
  Top Layer w0.2: X4.9 6.809,43.817 9.704,43.817 19.649,53.761 D1.29
SCL: pad.3@68.529,56.312 R5.2 SW1.2 X1.5 | length 71.9
  Top Layer w0.4: SW1.2 23.394,39.091 23.394,41.885 25.781,44.272 v1(36.22,44.272) ; X1.5@61.874,66.776 64.237,66.776 67.539,63.475 67.539,57.383 68.529,56.392 68.529,56.312 R5.2
  Bottom Layer w0.4: v1(36.22,44.272) 42.926,44.272 47.473,48.819 61.036,48.819 pad.3@68.529,56.312
SDA: pad.3@66.954,56.337 R4.2 SW1.5 X1.4 | length 64.7
  Top Layer w0.4: SW1.5 24.435,45.212 v1(32.944,45.212) ; X1.4@61.874,65.976 63.492,65.976 64.745,64.724 64.745,58.725 66.837,56.632 66.837,56.394 R4.2
  Bottom Layer w0.4: v1(32.944,45.212) 41.808,45.212 46.965,50.368 59.792,50.368 65.761,56.337 pad.3@66.954,56.337
TD+: C7.1 X1.18 | length 4.5
  Top Layer w0.4: C7.1 50.724,65.71 51.689,64.745 X1.18@53.674,64.745
TD-: C12.1 X1.19 | length 4.2
  Top Layer w0.4: C12.1 49.733,63.932 X1.19@53.674,63.932
TEST_DETECT: pad.3@72.451,37.332 R24.2 SW2.3 X2.6 | length 39.4
  Top Layer w0.4: SW2.3 47.066,39.37 47.066,34.072 51.852,29.286 53.486,29.286 60.55,36.35 X2.6 69.878,36.35 70.841,37.313 72.432,37.313 pad.3@72.451,37.332
TEST_SCL: pad.3@72.464,35.535 R23.2 SW1.3 X2.5 | length 63.9
  Top Layer w0.4: SW1.3 15.977,35.128 16.18,34.925 45.364,34.925 51.943,28.346 53.395,28.346 60.599,35.55 X2.5 71.136,35.55 pad.3@72.464,35.535
TEST_SDA: pad.3@72.466,33.934 R22.2 SW1.6 X2.4 | length 75.5
  Top Layer w0.4: SW1.6 13.97,39.827 13.97,35.255 15.011,34.214 45.187,34.214 51.875,27.525 57.218,27.525 57.685,27.992 57.685,31.787 60.648,34.75 X2.4 64.792,34.75 66.599,32.944 70.434,32.944 71.425,33.934 pad.3@72.466,33.934
TEST_TX_DISABLE: X2.3 X4.8 | length 67.5
  Top Layer w0.4: X4.8 v1(9.144,38.151) v1@9.22,38.151 ; v1(12.987,34.369) 13.761,33.594 44.958,33.594 51.627,26.925 59.107,26.925 60.147,27.965 60.147,33.401 60.646,33.9 62.035,33.9 X2.3
  Bottom Layer w0.4: v1(9.144,38.151) v1@13.005,34.29
TESTEN: D1.27 X4.27 | length 24.5
  Top Layer w0.2: X4.27 3.683,42.416 6.071,44.804 9.468,44.804 19.425,54.761 D1.27
TX_DISABLE: X1.3 X4.32 | length 75.3
  Top Layer w0.4: X4.32 9.042,56.007 11.074,58.039 11.074,70.104 13.284,72.314 v1(31.826,72.314) ; v1(59.868,65.1) 59.872,65.096 62.121,65.096 X1.3
  Bottom Layer w0.4: v1(31.826,72.314) 48.184,72.314 50.952,69.545 55.423,69.545 v1(59.868,65.1)
TX_EN: D1.20 X4.13 | length 17.8
  Top Layer w0.2: X4.13 9.017,54.61 12.668,58.261 D1.20
TX_ER: D1.22 X4.12 | length 18.5
  Top Layer w0.2: X4.12 10.871,51.841 16.291,57.261 D1.22
VCC_3,3V: C3.1 C4.2 C10.1 C11.2 C30.2 C31.2 C32.2 D3.2 L1.2 L2.2 L3.2 L4.2 P1.2 pad.3@28.778,15.494 pad.3@45.974,23.8 pad.3@58.649,52.502 R3.1 R4.1 R5.1 R6.1 R7.1 R21.1 R22.1 R23.1 R24.1 R25.1 R32.1 | length 185.5
  Top Layer w0.8: P1.2 65.989,76.86 74.041,68.809 74.041,51.511 68.885,46.355 65.938,46.355 ; L4.2 60.563,25.232 65.989,30.658 74.32,30.658 v1(74.651,30.988) ; C10.1 49.34,23.228 C32.2@49.34,19.571 ; L2.2@58.649,52.476 60.364,52.476 62.255,50.585 62.255,49.749 C3.1 ; C3.1@62.408,49.657 62.408,46.863 C4.2 62.96,46.711 63.24,46.99 63.551,46.99 64.186,46.355 65.938,46.355 ; 64.237,46.99 65.43,48.184 65.43,49.181 ; R3.1 65.43,49.181 ; R4.1 66.98,50.73 ; R5.1 68.529,52.351 ; R7.1 71.615,54.013 70.091,54.013 R6.1 70.079,53.901 68.529,52.351 ; v1(74.651,40.294) 73.924,41.021 71.272,41.021 65.938,46.355 ; 65.43,49.181 66.98,50.73 ; 66.98,50.73 68.45,52.201 68.45,52.273 68.529,52.351
  Top Layer w1: D3.2 31.14,17.12 42.882,17.12 44.939,15.062 45.339,15.062 45.288,15.113 45.288,19.177 45.682,19.571 C32.2@49.34,19.571 ; C11.2 45.618,23.241 49.276,23.241 L4.2
  Bottom Layer w0.8: v1(74.651,30.988) R21.1 R22.1 R23.1 R24.1 R25.1 v1(74.651,40.294) ; R21.1@74.708,32.107 74.808,32.207 R21.1@74.819,32.207
  Bottom Layer w1: R32.1 pad.3@28.778,15.494
VDD_2,5V: C17.1 C18.1 C19.2 C20.2 C21.1 C22.1 C23.1 C25.2 C26.2 C27.2 D1.1 D1.9 D1.23 D1.28 D1.48 D1.55 D1.57 D2.2 LQ1.4 pad.3@17.59,27.191 pad.3@24.257,77.775 pad.3@25.044,56.82 pad.3@25.076,54.261 pad.3@25.171,29.718 pad.3@32.36,56.667 pad.3@32.385,54.839 pad.3@32.614,47.93 pad.3@34.341,64.795 pad.3@37.935,56.528 pad.3@41.123,57.683 pad.3@43.409,49.835 R28.2 R30.1 R(REF).1 Rt(1).1 Rt(2).1 | length 160.9
  Top Layer w0.2: D1.28 25.076,54.261 pad.3@25.095,54.28 ; D1.23 22.853,56.79 25.015,56.79 pad.3@25.044,56.82 ; v1(28.524,60.223) 28.549,60.248 28.549,61.986 D1.9 ; pad.3@32.36,56.667 32.519,56.464 32.722,56.261 D1.57 ; pad.3@32.385,54.839 32.519,55.042 32.738,55.261 D1.55 ; D1.48 32.594,49.991 32.594,47.95 pad.3@32.614,47.93 ; D1.1 32.573,62.926 34.341,64.694 34.341,64.795 pad.3@34.341,64.897
  Top Layer w0.6: pad.3@41.214,57.707 41.214,59.343 41.214,60.983
  Top Layer w0.8: C25.2 25.019,29.071 C25.2@25.869,29.921
  Top Layer w1.5: D2.2 20.599,28.854 C25.2
  Bottom Layer w0.4: 35.687,47.955 41.529,47.955 pad.3@43.409,49.835
  Bottom Layer w0.6: C22.1@20.01,54.351 20.1,54.261 pad.3@25.076,54.261 ; C21.1 pad.3@25.044,56.82 ; pad.3@32.36,56.667 37.795,56.667 C20.2 ; pad.3@32.385,54.839 C19.2 ; pad.3@37.935,56.528 39.091,57.683 pad.3@41.123,57.683
  Bottom Layer w0.8: R30.1 17.551,27.153 17.59,27.191 pad.3@17.628,27.229 ; pad.3@24.282,77.749 24.257,77.775 22.555,77.775 20.031,75.25 20.031,60.95 ; pad.3@25.171,29.718 25.197,29.743 28.804,29.743 C27.2 28.829,43.637 ; v1(28.524,60.223) 27.305,61.443 C18.1 ; pad.3@34.341,64.795 34.188,64.643 32.842,64.643 32.096,63.897 27.391,63.897 C18.1 ; 35.636,47.904 C23.1 32.334,47.142 28.829,43.637 ; 35.687,47.955 37.948,50.216 C19.2 37.935,54.851 37.935,56.528 C20.2 ; 20.031,60.95 23.063,63.983 C18.1 ; 20.031,60.95 C21.1 20.01,56.799 20.01,54.351 C22.1 19.99,52.476 28.829,43.637
VDD_VAR1: C35.2 C36.2 C37.2 D4.2 pad.3@75.209,18.669 R34.1 X5.1 | length 62
  Top Layer w1.5: C35.2 75.311,16.256 D4.2
  Bottom Layer w0.8: X5.1 41.884,5.056 45.644,1.295 70.256,1.295 72.212,3.251 C37.2 72.212,7.423 75.26,10.471 C36.2 75.26,11.271 73.66,12.871 R34.1 73.76,21.058 73.76,20.118 pad.3@75.209,18.669
VDD_VAR2: C40.2 C41.2 C42.2 D5.2 pad.3@61.373,10.701 pad.3@64.516,10.643 R36.1 X5.2 | length 44.7
  Top Layer w0.8: C40.2 61.469,10.643 pad.3@64.516,10.643
  Top Layer w1.5: C40.2 61.392,15.088 D5.2
  Bottom Layer w0.8: X5.2 46.522,5.206 46.522,4.735 48.387,2.87 57.48,2.87 58.334,3.724 C42.2 58.459,4.648 63.229,9.418 63.59,9.418 64.44,10.268 C41.2 64.44,11.068 60.858,14.649 R36.1
Vt: R28.1 R29.2 Rt(3).1 Rt(4).1 | length 5.2
  Top Layer w1: 41.214,55.067 41.214,53.406 R29.2 41.232,51.613 41.232,49.886 R28.1
pads on no net: D1.31 D1.32 D1.34 D1.35 D1.36 D1.37 D1.39 D1.40 D1.42 D1.44 D1.45 D1.46 D1.47 D1.49 D1.50 D1.51 R31.1 R33.1 R35.1 R37.1 SW2.4 SW2.5 SW2.6 X1.7 X2.7 X2.12 X2.13 X2.18 X2.19 X4.1 X4.7 X4.14 X4.18 X4.19 X4.20 X4.21 X4.23 X4.25 X4.26 X4.37

## Polygon pours and split planes (outlines as drawn)
GND on Bottom Layer (hatched 45Degree grid 0.508 track 0.3, pour order 0): 89,2 88,3 2,3 2,82 89,82

## Keep-outs
Keep-Out Layer:
  the board outline again, w0.254

## Silkscreen, mask and mechanical layers (free items; w line width, h text height)
Top Overlay:
  text "NTK4_OPTO_SPB_CONTROL" at 43.256,80.188 h1